# Altium PCB ECE453_Interface_LEDs.PcbDoc
Units mm, origin at the board's own origin, x right, y up, seen from the top; angles counter-clockwise.
Board outline 54.97 x 116.43 mm, 2 copper layers (Top Layer, Bottom Layer); 60 components, 52 nets, 187 pads, 189 vias.
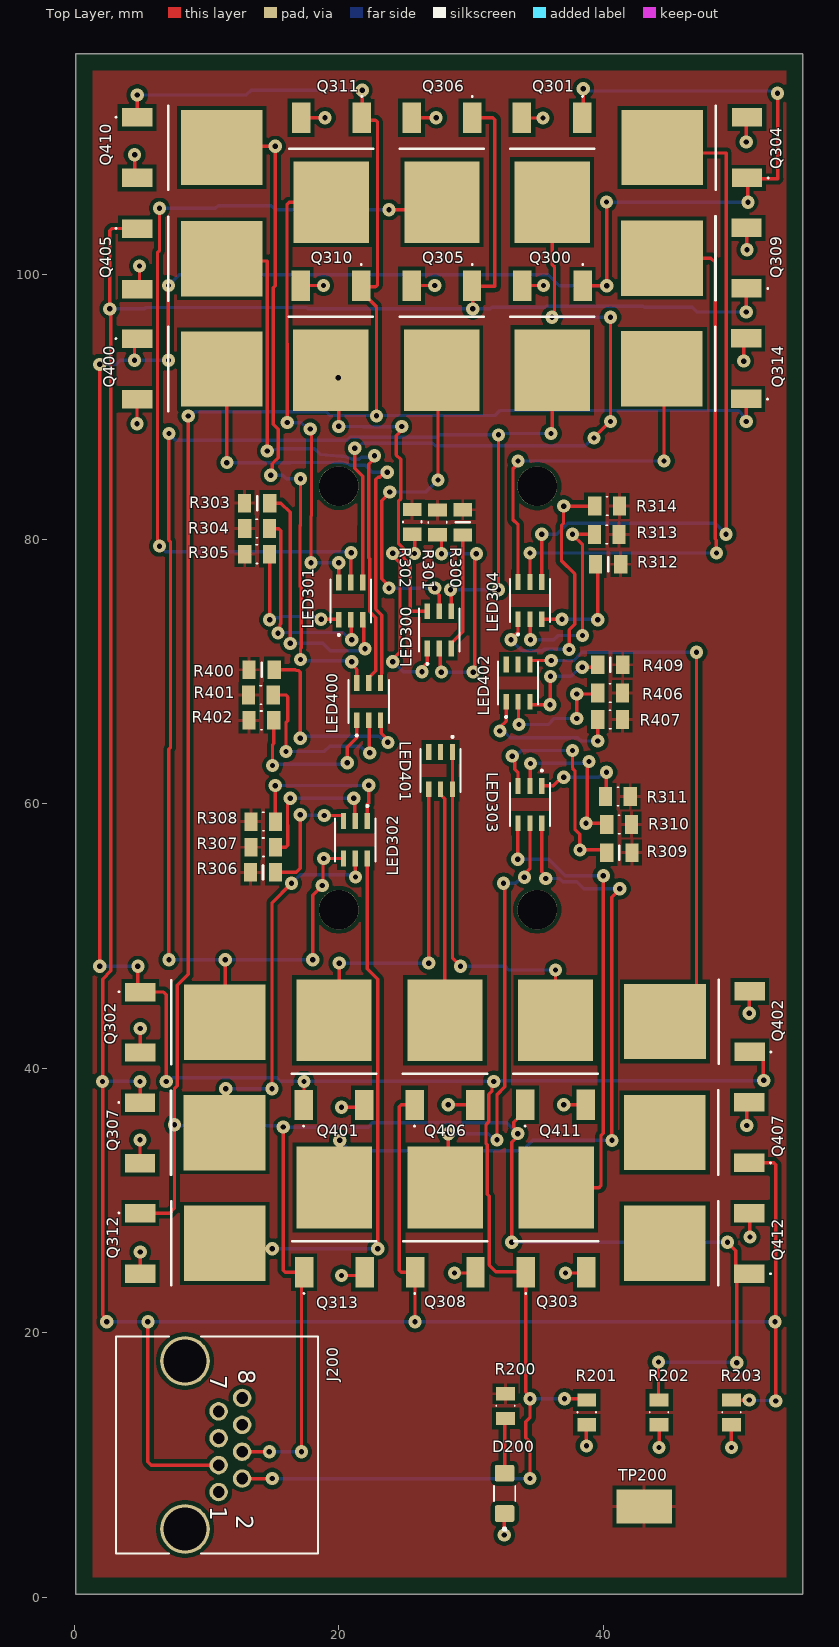
[diagram p0: Top Layer view]
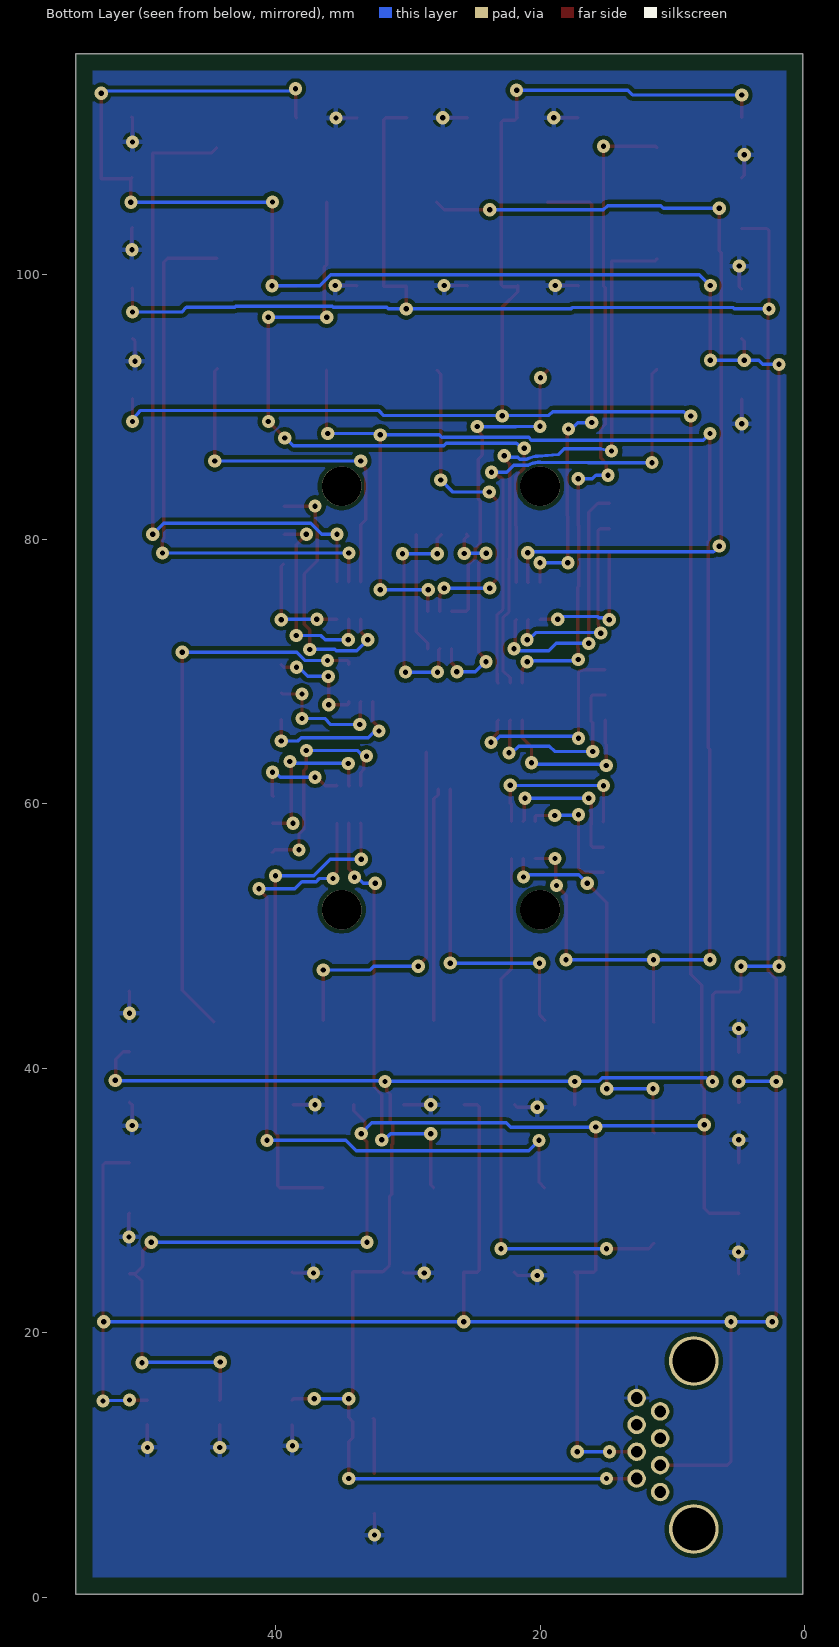
[diagram p1: Bottom Layer view, seen from below]

## Layer stack, top to bottom
Top Solder: solder mask 0.0102, Solder Resist, Dk 3.5
Top Layer: signal copper 0.0356
Dielectric1: dielectric 0.32, FR-4, Dk 4.8
Bottom Layer: signal copper 0.0356
Bottom Solder: solder mask 0.0102, Solder Resist, Dk 3.5

## Board outline
0.127,0.254 0.127,116.688 55.093,116.688 55.093,0.254

## Design rules (kind name [scope] priority, off if disabled: settings)
BoardOutlineClearance [All] p1: gap=1.27 ignorepadtopadclearanceinfootprint=FALSE
Clearance Polygon_Clearance [All vs InPolygon] p1: gap=0.305 ignorepadtopadclearanceinfootprint=FALSE except(0: Arc-Hole Track-Hole SMDPad-Hole THPad-Hole Via-Hole Fill-Hole Poly-Hole Region-Hole Text-Hole)
Clearance [All] p2: gap=0.2 ignorepadtopadclearanceinfootprint=TRUE except(0: Arc-Hole Track-Hole SMDPad-Hole THPad-Hole Via-Hole Fill-Hole Poly-Hole Region-Hole Text-Hole)
ComponentClearance [InComponent('U3')] p1: gap=0 collisioncheckmode=3 verticalgap=0.254 showdistances=FALSE
Height [All] p1: minheight=0 maxheight=22 prefheight=12.7
HoleSize [All] p1: absolutevalues=TRUE maxlimit=6.35 minlimit=0.03 maxpercent=80.000 minpercent=20.000
MinimumAnnularRing [All] p1: minimumring=0.178
MinimumSolderMaskSliver [All] p1: minsoldermaskwidth=0.178
NetAntennae NetAntennae_5.0V [InNet('5.0V')] p1: netantennaetolerance=0
NetAntennae NetAntennae_3.3V [InNet('3.3V')] p2: netantennaetolerance=0
PolygonConnect [IsNamedPolygon('5.0V_L01_P019') or IsNamedPolygon('3.3V_L01_P020') vs IsVia] p1: connectstyle=Relief reliefconductorwidth=0.254 reliefentries=4 polygonreliefangle="90 Angle" airgapwidth=0.254
PolygonConnect PolygonConnect_2 [All vs IsVia] p2: connectstyle=Relief reliefconductorwidth=0.381 reliefentries=4 polygonreliefangle="90 Angle" airgapwidth=0.254
PolygonConnect PolygonConnect_1 [All] p3: connectstyle=Relief reliefconductorwidth=0.254 reliefentries=4 polygonreliefangle="90 Angle" airgapwidth=0.254
RoutingVias [All] p1: holewidth=0.711 width=1.27 viastyle="Through Hole" minholewidth=0.381 minwidth=0.635 maxholewidth=0.711 maxwidth=1.27
SolderMaskExpansion [All] p1: expansion=0.102 istentingtop=FALSE
Width [All] p1: maxlimit=12 minlimit=0.1 preferedwidth=0.254 minimp=50.000000 maximp=50.000000 favimp=50.000000
25 further rules are at their usual default settings.

## Classes and differential pairs
component class 04_LEDs_5_9: LED400 LED401 LED402 Q400 Q401 Q402 Q405 Q406 Q407 Q410 Q411 Q412 R400 R401 R402 R403 R404 R405 R406 R407 R409
component class 03_LEDs_0_4: LED300 LED301 LED302 LED303 LED304 Q300 Q301 Q302 Q303 Q304 Q305 Q306 Q307 Q308 Q309 Q310 Q311 Q312 Q313 Q314 R300 R301 R302 R303 R304 R305 R306 R307 R308 R309 R310 R311 R312 R313 R314
component class 02_Input: D200 J200 R200 R201 R202 R203 TP200

## Components (designator, comment, footprint, x,y, rotation, side; value= is the part's Value field where it differs from the comment)
D200 "598-8220-107F" LEDSC160X320X90-2N 32.537,7.873 r90 top
J200 "RJHSE-5080" CONN_RJSBE5080_16P13X12P57_AMP 10.922,7.976 r270 top
LED300 "ASMT-YTB7-0AA02" LED_ASMT-YTB2-0BB02 27.595,73.139 r90 top
LED301 "ASMT-YTB7-0AA02" LED_ASMT-YTB2-0BB02 20.904,75.324 r90 top
LED302 "ASMT-YTB7-0AA02" LED_ASMT-YTB2-0BB02 21.26,57.277 r270 top
LED303 "ASMT-YTB7-0AA02" LED_ASMT-YTB2-0BB02 34.453,59.942 r270 top
LED304 "ASMT-YTB7-0AA02" LED_ASMT-YTB2-0BB02 34.453,75.364 r90 top
LED400 "ASMT-YTB7-0AA02" LED_ASMT-YTB2-0BB02 22.261,67.716 r90 top
LED401 "ASMT-YTB7-0AA02" LED_ASMT-YTB2-0BB02 27.697,62.5 r270 top
LED402 "ASMT-YTB7-0AA02" LED_ASMT-YTB2-0BB02 33.553,69.126 r90 top
Q300 "SIHFR120-GE3" SIHFR120GE3 36.144,95.815 r180 top
Q301 "SIHFR120-GE3" SIHFR120GE3 36.13,108.515 r180 top
Q302 "SIHFR120-GE3" SIHFR120GE3 8.336,43.485 r270 top
Q303 "SIHFR120-GE3" SIHFR120GE3 36.435,27.934 r0 top
Q304 "SIHFR120-GE3" SIHFR120GE3 47.509,109.601 r90 top
Q305 "SIHFR120-GE3" SIHFR120GE3 27.787,95.815 r180 top
Q306 "SIHFR120-GE3" SIHFR120GE3 27.799,108.515 r180 top
Q307 "SIHFR120-GE3" SIHFR120GE3 8.321,35.128 r270 top
Q308 "SIHFR120-GE3" SIHFR120GE3 28.053,27.934 r0 top
Q309 "SIHFR120-GE3" SIHFR120GE3 47.484,101.244 r90 top
Q310 "SIHFR120-GE3" SIHFR120GE3 19.405,95.815 r180 top
Q311 "SIHFR120-GE3" SIHFR120GE3 19.442,108.515 r180 top
Q312 "SIHFR120-GE3" SIHFR120GE3 8.336,26.772 r270 top
Q313 "SIHFR120-GE3" SIHFR120GE3 19.671,27.934 r0 top
Q314 "SIHFR120-GE3" SIHFR120GE3 47.464,92.888 r90 top
Q400 "SIHFR120-GE3" SIHFR120GE3 8.108,92.862 r270 top
Q401 "SIHFR120-GE3" SIHFR120GE3 19.645,40.583 r0 top
Q402 "SIHFR120-GE3" SIHFR120GE3 47.718,43.536 r90 top
Q405 "SIHFR120-GE3" SIHFR120GE3 8.108,101.194 r270 top
Q406 "SIHFR120-GE3" SIHFR120GE3 28.027,40.583 r0 top
Q407 "SIHFR120-GE3" SIHFR120GE3 47.693,35.154 r90 top
Q410 "SIHFR120-GE3" SIHFR120GE3 8.108,109.601 r270 top
Q411 "SIHFR120-GE3" SIHFR120GE3 36.384,40.589 r0 top
Q412 "SIHFR120-GE3" SIHFR120GE3 47.693,26.772 r90 top
R200 "1625868-6" RESC2012X65N 32.614,14.473 r90 top
R201 "1614886-1" RESC2012X65N 38.749,13.991 r90 top
R202 "1614886-1" RESC2012X65N 44.216,13.991 r90 top
R203 "1614886-1" RESC2012X65N 49.682,13.991 r90 top
R300 "CR0805-JW-510ELF" RESC2012X60N 29.373,81.273 r270 top
R301 "1-2176327-0" RESC2012X65N 27.468,81.268 r90 top
R302 "1-2176327-0" RESC2012X65N 25.552,81.305 r90 top
R303 "CR0805-JW-510ELF" RESC2012X60N 13.829,82.728 r0 top
R304 "1-2176327-0" RESC2012X65N 13.829,80.797 r180 top
R305 "1-2176327-0" RESC2012X65N 13.829,78.867 r180 top
R306 "CR0805-JW-510ELF" RESC2012X60N 14.28,54.813 r0 top
R307 "1-2176327-0" RESC2012X65N 14.295,56.718 r180 top
R308 "1-2176327-0" RESC2012X65N 14.295,58.649 r180 top
R309 "CR0805-JW-510ELF" RESC2012X60N 41.21,56.312 r180 top
R310 "1-2176327-0" RESC2012X65N 41.195,58.438 r0 top
R311 "1-2176327-0" RESC2012X65N 41.097,60.554 r0 top
R312 "CR0805-JW-510ELF" RESC2012X60N 40.361,78.105 r180 top
R313 "1-2176327-0" RESC2012X65N 40.26,80.349 r0 top
R314 "1-2176327-0" RESC2012X65N 40.284,82.499 r0 top
R400 "CR0805-JW-510ELF" RESC2012X60N 14.173,70.129 r0 top
R401 "1-2176327-0" RESC2012X65N 14.122,68.223 r180 top
R402 "1-2176327-0" RESC2012X65N 14.148,66.307 r180 top
R406 "1-2176327-0" RESC2012X65N 40.508,68.377 r0 top
R407 "1-2176327-0" RESC2012X65N 40.508,66.37 r0 top
R409 "CR0805-JW-510ELF" RESC2012X60N 40.523,70.51 r180 top
TP200 "TP_1206" TP-SMC-1206 43.078,6.883 r180 top

## Footprints (in the part's own frame and the unit in brackets; to place one, negate y for a bottom-side part, rotate by r counter-clockwise, add the part's x,y. Pads: shape width x height; smd on the part's side, far side on the other; paste and mask are expansions set on the pad)
CONN_RJSBE5080_16P13X12P57_AMP [mil]
  round 55 hole 35 mask+0: 1(0,0) 2(-40,70) 3(-80,0) 4(-120,70) 5(-160,0) 6(-200,70) 7(-240,0) 8(-280,70)
  round 148 hole 128: 9(-390,-100) 10(110,-100)
  silkscreen extent -463,-305 183,295, body extent 0,0 10,10, height 10
LED_ASMT-YTB2-0BB02 [mil]
  rect 47x16 smd paste+0 mask+0: 1(55.5,-35.43) 2(55.5,0) 3(55.5,35.43) 4(-55.5,35.43) 5(-55.5,0) 6(-55.5,-35.43)
  silkscreen extent -104,-60 64,60, body extent 0,0 10,10, height 10
LEDSC160X320X90-2N [mm] "Red Clear status LED"
  rrect25% 1.27x1.48 smd: A(1.525,0) C(-1.525,0)
  silkscreen extent -2.8,-0.8 0.57,0.8, body extent -1.6,-0.8 1.6,0.8, height 0.7
RESC2012X60N [mm]
  rect 1x1.4 smd: 1(-0.95,0) 2(0.95,0)
  silkscreen extent 0,-0.53 0,0.53, body extent -1,-0.63 1,0.63, height 0.6
RESC2012X65N [mm]
  rect 1x1.42 smd: 1(-0.935,0) 2(0.935,0)
  silkscreen extent -0.03,-0.7 0.05,0.7
SIHFR120GE3 [mil]
  rect 55x90 smd: 1(-90,-131.69) 2(90,-131.69)
  rect 224.02x243.31 smd: 3(0,120.24)
  silkscreen extent -125,-197 125,-39
TP-SMC-1206 [mm]
  rect 4.2x2.6 smd mask+0: 1(0,0)
  body extent -1.57,-0.79 1.63,0.81, height 1.22

## Part data
D200: "Red 625nm LED Indication - Discrete 2V 1206 _3216 Metric_", Package="1206 Dialight", MF=Dialight, MP=598-8220-107F, SnapEDA_Link=https://www.snapeda.com/parts/598-8220-107F/Dialight/view-part/454138/?ref=snap
J200: "Jack Modular Connector 8p8c (RJ45, Ethernet) 90Â° Angle (Right) Unshielded", Digikey Part No.=RJHSE-5080-ND, Manufacturer="Amphenol CS (Commercial Products)", Package=None, Digi-Key_Part_Number=RJHSE-5080-ND, Manufacturer Part No.=RJHSE-5080, MF="Amphenol Commercial Products", MP=RJHSE-5080, SnapEDA_Link=https://www.snapeda.com/parts/RJHSE-5080/Amphenol/view-part/4796273/?ref=snap
LED300 LED301 LED302 LED303 LED304 LED400 LED401 LED402: "No Description Available", Mfr_Name=Broadcom, Copyright="Copyright (C) 2022 Ultra Librarian. All rights reserved.", Digi-Key_Part_Number_1=ASMT-YTB7-0AA02-ND, Digi-Key_Part_Number_2=516-3132-2-ND, Digi-Key_Part_Number_3=516-3132-1-ND, Digi-Key_Part_Number_4=516-3132-6-ND, Manufacturer_Part_Number=ASMT-YTB7-0AA02, RefDes=RefDes, Type=DEV
Q300 Q301 Q302 Q303 Q304 Q305 Q306 Q307 Q308 Q309 Q310 Q311 Q312 Q313 Q314 Q400 Q401 Q402 Q405 Q406 Q407 Q410 Q411 Q412: "MOSFET (N-Channel)", Manufacturer_Name=Vishay, Datasheet Link=https://www.mouser.in/datasheet/2/427/91266-1768752.pdf, Height=2.38mm, Manufacturer_Part_Number=SIHFR120-GE3
R200: "Resistor 0805 200R 0.1% 25ppm (reel)", Package=None, Availability=Unavailable, MP=1625868-6, Price=None
R201 R202 R203: "CPF0805 10K 0.1% 25PPM 5K RL", Package=0805, Power_Rating=".1 W", Resistance=10K, Tolerance=.1%, Voltage_Rating="100 V", Availability=Warning, Check_prices=https://www.snapeda.com/parts/1614886-1/TE%20Connectivity/view-part/2202344/?ref=eda, EU_RoHS_Compliance=Compliant, MF="TE Connectivity", MP=1614886-1, Price=None, SnapEDA_Link=https://www.snapeda.com/parts/1614886-1/TE%20Connectivity/view-part/2202344/?ref=snap
R300 R303 R306 R309 R312 R400 R409: "Resistor", Manufacturer_Name=Bourns, Datasheet Link=https://www.bourns.com/pdfs/chpreztr.pdf, Height=0.6mm, Manufacturer_Part_Number=CR0805-JW-510ELF
R301 R302 R304 R305 R307 R308 R310 R311 R313 R314 R401 R402 R406 R407: "Fixed Resistor CRGP 0805 56R 1%", Package=None, Availability=Unavailable, MP=1-2176327-0, Price=None
TP200: "Test Point SMD 1206", Case Size=1206, Manufacturer="TE Connectivity (Tyco Electronics)", Manufacturer Part Number=1625854-1, Operating Temperature="-55 to 125 C", Power Rating=N/R, Resistance Value="0 Ohm", Supplier Part Number=A106143CT-ND, ComponentLink1Description=https://datasheet.ciiva.com/6439/eng-ds-1773266-a-6439169.pdf, ComponentLink1URL=https://datasheet.ciiva.com/6439/eng-ds-1773266-a-6439169.pdf, ComponentLink2Description=https://datasheet.ciiva.com/30136/1773266-a-30136341.pdf, ComponentLink2URL=https://datasheet.ciiva.com/30136/1773266-a-30136341.pdf, ComponentLink3Description=https://datasheet.ciiva.com/6439/eng-ds-1773266-a-6439080.pdf, ComponentLink3URL=https://datasheet.ciiva.com/6439/eng-ds-1773266-a-6439080.pdf, ComponentLink4Description=https://datasheet.ciiva.com/6439/eng-ds-1773266-a-6439081.pdf, ComponentLink4URL=https://datasheet.ciiva.com/6439/eng-ds-1773266-a-6439081.pdf, ComponentLink5Description=https://datasheet.ciiva.com/6439/eng-ds-1773266-a-6439083.pdf, ComponentLink5URL=https://datasheet.ciiva.com/6439/eng-ds-1773266-a-6439083.pdf, Dimension="3.2 x 1.6 x 1.25mm", Family=RC, Mounting="Surface Mount", Packaging="Tape and Reel", Part No=1625854-1, Pricing 1="1=0.28, 10=0.261, 25=0.224, 50=0.1902, 100=0.1828, 250=0.1641, 500=0.1567, 1000=0.1306 (USD)", RoHS=Yes, Stock 1=31937, Supplier=Digi-Key, Temperature Coefficient=N/R, Terminal Pitch=N/R, Termination Style=N/R, Tolerance=N/R

## Free pads (board coordinates)
  round 3 hole 3: mount(35,84) mount1(20,52) mount1(20,84) mount1(35,52)

## Via types
v1: diameter 1, hole 0.4, Top Layer to Bottom Layer, 189 vias

## Nets (pads, with @x,y where several pads share a name; then routed paths per layer and width w, separated by ;. In a path a pad name is that pad's centre, name@x,y a point inside that pad or via, vN(x,y) a via of type N, cw(c..) or ccw(c..) an arc to the next point about the centre after c; other vN are vias at no path point)
5.0V: R200.2 R300.1 R301.2 R302.2 R303.1 R304.2 R305.2 R306.1 R307.2 R308.2 R309.1 R310.2 R311.2 R312.1 R313.2 R314.2 R400.1 R401.2 R402.2 R406.2 R407.2 R409.1 TP200.1
GND: D200.C J200.8 Q300.2 Q301.2 Q302.2 Q303.2 Q304.2 Q305.2 Q306.2 Q307.2 Q308.2 Q309.2 Q310.2 Q311.2 Q312.2 Q313.2 Q314.2 Q400.2 Q401.2 Q402.2 Q405.2 Q406.2 Q407.2 Q410.2 Q411.2 Q412.2 R201.1 R202.1 R203.1 | length 49.3
  Top Layer w0.254: v1(4.572,109.055) 4.572,107.505 Q410.2 ; v1(4.75,88.728) 4.75,90.564 Q400.2 ; Q405.2 4.94,99.085 v1(4.94,100.647) ; Q307.2 v1(4.976,34.595) ; Q312.2 5.004,24.498 v1(5.004,26.111) v1@5.004,26.365 ; Q302.2 v1(4.991,43.008) ; Q310.2 17.134,99.174 v1(18.85,99.174) ; Q311.2 v1(18.96,111.86) ; v1(20.206,24.346) 21.713,24.346 Q313.2 ; v1(20.206,37.054) 21.747,37.054 Q401.2 ; Q305.2 25.516,99.174 v1(27.255,99.174) ; Q306.2 v1(27.362,111.86) ; v1(28.27,37.244) 30.307,37.244 Q406.2 ; v1(28.753,24.536) 30.286,24.536 Q308.2 ; v1(32.512,4.724) 32.512,6.323 D200.C ; Q301.2 33.867,111.836 v1(35.433,111.836) v1@35.484,111.836 ; Q300.2 33.873,99.174 v1(35.484,99.174) ; v1(37.008,37.244) Q411.2 ; v1(37.135,24.536) 38.668,24.536 Q303.2 ; v1(38.721,11.464) 38.721,13.028 R201.1 ; v1(44.216,11.348) R202.1 ; v1(49.682,11.348) R203.1 ; v1(50.619,93.459) 50.619,94.983 Q314.2 ; v1(50.809,110.027) 50.809,111.842 Q304.2 ; Q309.2 50.854,103.505 v1(50.854,101.875) ; v1(50.838,35.674) 50.838,37.24 Q407.2 ; Q412.2 51.079,29.016 v1(51.079,27.254) ; v1(51.038,44.166) 51.038,45.796 Q402.2
LED_1_BLUE_IN: LED300.6 R300.2 | length 9
  Top Layer w0.254: LED300.6 28.495,72.123 29.373,73.001 R300.2
LED_1_BLUE_OUT: LED300.1 LED302.1 Q300.3 Q302.3 | length 116.1
  Top Layer w0.254: v1(7.163,48.209) 7.163,64.129 7.279,64.244 7.279,79.819 7.163,79.935 v1(7.163,87.986) ; Q302.3 11.43,43.525 v1(11.43,48.209) ; v1(18.034,48.209) 18.034,53.093 18.601,53.66 18.756,53.66 v1(18.756,53.814) 18.814,53.872 18.814,55.809 v1(18.872,55.867) LED302.1 ; v1(28.448,76.175) 28.495,76.127 LED300.1 ; v1(32.08,76.175) v1(32.08,87.884) ; v1(36.043,87.986) 36.144,88.087 Q300.3
  Bottom Layer w0.254: v1(7.163,48.209) v1(11.43,48.209) v1(18.034,48.209) ; v1(7.163,87.986) 7.583,87.566 7.657,87.491 20.662,87.491 20.862,87.692 21.547,87.692 ccw(c21.569,87.945) 21.592,87.692 27.293,87.692 27.295,87.689 27.435,87.689 27.63,87.884 v1(32.08,87.884) ; v1(28.448,76.175) v1(32.08,76.175) ; v1@32.08,87.986 v1(36.043,87.986)
LED_1_GREEN_IN: LED300.5 R301.1 | length 17.5
  Top Layer w0.254: R301.1 27.767,80.034 v1(27.767,78.892) ; LED300.5 27.672,71.653 27.672,70.039 v1(27.759,69.952) ; v1(30.175,69.952) 30.29,70.066 30.29,78.778 v1(30.404,78.892)
  Bottom Layer w0.254: v1(27.759,69.952) v1(30.175,69.952) ; v1(27.767,78.892) v1(30.404,78.892)
LED_1_GREEN_OUT: LED300.2 Q305.3 | length 25.6
  Top Layer w0.254: v1(23.8,76.301) 23.8,76.452 23.252,77 23.252,82.918 23.851,83.517 v1(23.851,83.566) ; v1@27.356,76.301 v1(27.255,76.301) 27.255,76.1 27.595,75.759 LED300.2 ; v1(27.507,84.478) 27.507,92.48 Q305.3
  Bottom Layer w0.254: v1(23.8,76.301) v1(27.255,76.301) ; v1(23.851,83.566) 26.595,83.566 v1(27.507,84.478)
LED_1_RED_IN: LED300.4 R302.1 | length 16.4
  Top Layer w0.254: v1(24.079,78.943) 24.079,78.76 24.627,78.212 24.627,71.445 24.087,70.905 v1(24.087,70.739) ; R302.1 25.419,80.237 25.494,80.237 25.733,79.997 v1(25.733,78.918) ; v1(26.289,69.977) 26.289,70.252 26.695,70.658 LED300.4
  Bottom Layer w0.254: v1(24.079,78.943) 24.092,78.93 25.721,78.93 v1(25.733,78.918) ; v1(24.087,70.739) 24.126,70.739 24.888,69.977 v1(26.289,69.977)
LED_1_RED_OUT: LED300.3 Q310.3 | length 25.2
  Top Layer w0.254: Q310.3 20.004,92.162 v1(20.004,88.526) ; v1(24.755,88.519) 24.612,88.376 24.612,88.086 24.359,87.832 24.359,86.36 24.678,86.041 24.678,83.038 24.515,82.876 24.515,79.677 24.906,79.286 24.906,78.575 25.419,78.063 25.419,74.698 25.568,74.549 LED300.3
  Bottom Layer w0.254: v1(20.004,88.526) 20.012,88.519 21.816,88.519 21.842,88.494 24.73,88.494 v1(24.755,88.519)
  other v1: 19.964,92.202
LED_2_BLUE_IN: LED301.6 R303.2 | length 20
  Top Layer w0.254: R303.2 15.625,82.728 16.328,82.025 v1(16.328,72.123) ; LED301.6 21.88,73.838 21.88,71.823 v1(21.979,71.724)
  Bottom Layer w0.254: v1(16.328,72.123) 18.792,72.123 19.353,71.563 21.616,71.563 21.777,71.724 v1(21.979,71.724)
LED_2_BLUE_OUT: LED301.1 Q301.3 | length 51.9
  Top Layer w0.254: v1(21.205,86.865) 21.216,86.854 21.216,85.368 21.827,84.757 21.827,80.991 21.804,80.969 LED301.1 ; v1(36.119,96.774) 36.119,96.976 36.311,97.168 36.311,100.574 36.13,100.755 Q301.3 ; v1(39.294,87.655) v1(40.538,88.9) v1(40.538,96.774)
  Bottom Layer w0.254: v1(21.205,86.865) 21.407,86.865 21.78,87.238 27.105,87.238 27.286,87.057 38.646,87.057 39.244,87.655 v1(39.294,87.655) ; v1(36.119,96.774) v1(40.538,96.774)
LED_2_GREEN_IN: LED301.5 R304.1 | length 16.1
  Top Layer w0.254: R304.1 15.476,80.797 15.625,80.649 15.625,73.596 15.556,73.527 15.556,73.043 v1(15.413,72.9) ; LED301.5 20.942,73.876 20.942,72.428 v1(20.98,72.39)
  Bottom Layer w0.254: v1(15.413,72.9) 15.463,72.95 20.295,72.95 20.855,72.39 v1(20.98,72.39)
LED_2_GREEN_OUT: LED301.2 Q306.3 | length 64.4
  Top Layer w0.254: v1(6.452,79.477) 6.452,79.678 6.3,79.83 6.3,101.665 6.452,101.817 v1(6.452,105.012) ; LED301.2 20.921,76.75 20.921,78.953 v1(20.937,78.97) ; v1(23.8,104.906) 27.244,104.906 Q306.3
  Bottom Layer w0.254: v1(6.452,79.477) 6.886,79.042 20.865,79.042 v1(20.937,78.97) ; v1(6.452,105.012) 10.674,105.012 10.879,105.217 14.899,105.217 15.21,104.906 v1(23.8,104.906)
LED_2_RED_IN: LED301.4 R305.1 | length 10.4
  Top Layer w0.254: R305.1 14.776,78.854 v1(14.776,73.917) ; v1(18.669,73.954) 19.964,73.954 LED301.4
  Bottom Layer w0.254: v1(14.776,73.917) 14.916,74.057 15.57,74.057 15.67,74.157 18.265,74.157 18.467,73.954 v1(18.669,73.954)
LED_2_RED_OUT: LED301.3 Q311.3 | length 35.6
  Top Layer w0.254: v1(16.1,88.813) 16.1,94.795 16.094,94.801 16.094,105.312 16.243,105.461 Q311.3 ; v1(17.844,88.322) 17.937,88.229 17.937,81.753 17.899,81.715 v1(17.899,78.215) ; LED301.3 v1(20.004,78.215)
  Bottom Layer w0.254: v1(16.1,88.813) 17.152,88.813 17.642,88.322 v1(17.844,88.322) ; v1(17.899,78.215) v1(20.004,78.215)
LED_3_BLUE_IN: LED302.6 R306.2 | length 9.8
  Top Layer w0.254: R306.2 16.797,54.813 17.094,55.111 v1(17.094,59.17) v1@17.12,59.144 ; v1@18.872,59.144 v1(18.898,59.118) 20.284,59.118 20.36,59.042 LED302.6
  Bottom Layer w0.254: v1(17.094,59.17) 17.12,59.144 18.872,59.144 v1(18.898,59.118)
LED_3_GREEN_IN: LED302.5 R307.1 | length 11.2
  Top Layer w0.254: R307.1 16.006,56.718 16.154,56.867 16.154,58.399 16.132,58.421 16.132,59.954 16.328,60.149 v1(16.328,60.424) ; v1(21.143,60.424) 21.202,60.366 21.202,58.745 LED302.5
  Bottom Layer w0.254: v1(16.328,60.424) v1(21.143,60.424)
LED_3_GREEN_OUT: LED302.2 Q307.3 | length 29.6
  Top Layer w0.254: Q307.3 11.466,35.219 v1(11.466,38.466) ; v1(14.961,38.466) 14.961,52.516 v1(16.43,53.986) ; v1(21.26,54.458) LED302.2
  Bottom Layer w0.254: v1(11.466,38.466) v1(14.961,38.466) ; v1(16.43,53.986) 17.085,54.641 20.874,54.641 21.058,54.458 v1(21.26,54.458)
LED_3_RED_IN: LED302.4 R308.1 | length 12.5
  Top Layer w0.254: v1(15.205,61.373) 15.205,58.674 R308.1 ; LED302.4 22.16,59.951 22.261,60.052 v1(22.261,61.392)
  Bottom Layer w0.254: v1(15.205,61.373) 15.218,61.386 22.256,61.386 v1(22.261,61.392)
LED_3_RED_OUT: LED302.3 Q312.3 | length 41.6
  Top Layer w0.254: Q312.3 11.797,26.365 v1(14.972,26.365) ; LED302.3 22.16,47.52 22.957,46.723 v1(22.957,26.365)
  Bottom Layer w0.254: v1(14.972,26.365) v1(22.957,26.365)
LED_4_BLUE_IN: LED303.6 R309.2 | length 17
  Top Layer w0.254: v1(33.122,63.602) 33.316,63.407 33.316,62.596 33.553,62.358 LED303.6 ; v1(37.666,64.03) 37.666,62.703 37.857,62.512 37.857,58.061 38.227,57.692 v1(38.227,56.515) 40.057,56.515 R309.2
  Bottom Layer w0.254: v1(33.122,63.602) 33.397,63.602 33.825,64.03 v1(37.666,64.03)
LED_4_BLUE_OUT: LED303.1 Q303.3 | length 36.7
  Top Layer w0.254: v1(33.524,55.809) 33.539,55.824 33.539,58.517 LED303.1 ; Q303.3 39.673,30.988 39.822,31.137 39.822,34.898 40.005,35.081 v1(40.005,54.564)
  Bottom Layer w0.254: v1(33.524,55.809) 35.861,55.809 37.106,54.564 v1(40.005,54.564)
LED_4_GREEN_IN: LED303.5 R310.1 | length 12.5
  Top Layer w0.254: LED303.5 34.435,61.37 34.473,61.408 34.473,63.023 v1(34.493,63.043) ; v1(38.913,63.202) 38.798,63.087 38.798,58.636 v1(38.684,58.522) 38.798,58.522 R310.1@40.23,58.522
  Bottom Layer w0.254: v1(34.493,63.043) 34.519,63.068 38.779,63.068 v1(38.913,63.202)
LED_4_GREEN_OUT: LED303.2 Q308.3 | length 33.7
  Top Layer w0.254: Q308.3 28.27,31.206 v1(28.27,35.049) ; v1(31.963,34.595) 31.963,38.007 32.552,38.596 32.552,53.891 v1(32.457,53.986) ; v1(34.032,54.454) 34.032,54.656 34.453,55.077 LED303.2
  Bottom Layer w0.254: v1(28.27,35.049) 31.306,35.049 31.761,34.595 v1(31.963,34.595) ; v1(32.457,53.986) 33.362,53.986 33.83,54.454 v1(34.032,54.454)
LED_4_RED_IN: LED303.4 R311.1 | length 7.2
  Top Layer w0.254: LED303.4@35.394,61.392 LED303.4 36.221,61.352 36.871,62.001 v1(37.008,62.001) ; R311.1 40.234,60.625 v1(40.234,62.375)
  Bottom Layer w0.254: v1(37.008,62.001) 39.658,62.001 40.032,62.375 v1(40.234,62.375)
LED_4_RED_OUT: LED303.3 Q313.3 | length 54.5
  Top Layer w0.254: Q313.3 20.08,31.398 v1(20.08,34.555) ; LED303.3 35.353,54.856 35.656,54.554 v1(35.656,54.352) ; v1(40.649,34.555) 40.649,52.934 41.25,53.535 v1(41.25,53.579)
  Bottom Layer w0.254: v1(20.08,34.555) 20.868,33.768 33.885,33.768 34.673,34.555 v1(40.649,34.555) ; v1(35.656,54.352) 36.676,54.352 36.918,54.11 37.999,54.11 38.529,53.579 v1(41.25,53.579)
LED_5_BLUE_IN: LED304.6 R312.2 | length 8.5
  Top Layer w0.254: LED304.6 v1(36.871,73.954) ; R312.2 39.573,77.942 v1(39.573,73.914)
  Bottom Layer w0.254: v1(36.871,73.954) 36.891,73.934 39.553,73.934 v1(39.573,73.914)
LED_5_BLUE_OUT: LED304.1 Q304.3 | length 52
  Top Layer w0.254: LED304.1 v1(35.353,80.37) ; Q304.3 44.866,109.19 49.281,109.19 v1(49.281,80.37)
  Bottom Layer w0.254: v1(35.353,80.37) 36.497,80.37 37.324,81.197 48.454,81.197 v1(49.281,80.37)
LED_5_GREEN_IN: LED304.5 R313.1 | length 15.3
  Top Layer w0.254: LED304.5 34.473,73.935 34.473,72.41 v1(34.493,72.39) ; v1(38.43,72.72) 38.43,79.569 37.666,80.333 v1(37.666,80.37) 39.303,80.37 R313.1
  Bottom Layer w0.254: v1(34.493,72.39) 36.252,72.39 36.582,72.72 v1(38.43,72.72)
LED_5_GREEN_OUT: LED304.2 Q309.3 | length 42.4
  Top Layer w0.254: LED304.2 v1(34.453,78.952) ; Q309.3 48.133,101.244 48.454,100.924 48.454,80.028 48.548,79.934 v1(48.548,78.952)
  Bottom Layer w0.254: v1(34.453,78.952) v1(48.548,78.952)
LED_5_RED_IN: LED304.4 R314.1 | length 20.4
  Top Layer w0.254: v1(33.023,72.39) 33.023,72.478 33.553,73.008 LED304.4 ; v1(37.414,71.653) 37.414,73.137 37.833,73.556 37.833,77.371 36.839,78.364 36.839,81.016 36.989,81.166 36.989,82.48 v1(37.008,82.499) R314.1
  Bottom Layer w0.254: v1(33.023,72.39) 33.85,71.563 35.404,71.563 35.516,71.676 37.392,71.676 v1(37.414,71.653)
LED_5_RED_OUT: LED304.3 Q314.3 | length 27.5
  Top Layer w0.254: LED304.3 33.553,81.097 33.173,81.478 33.173,85.332 33.553,85.712 v1(33.553,85.914) ; Q314.3 44.588,92.71 v1(44.588,85.914)
  Bottom Layer w0.254: v1(33.553,85.914) v1(44.588,85.914)
LED_6_BLUE_IN: LED400.5 R401.1 | length 14.5
  Top Layer w0.254: R401.1 16.006,68.223 16.154,68.074 16.154,66.259 16.013,66.117 v1(16.013,63.952) ; LED400.5 22.302,66.266 22.302,63.888 v1(22.343,63.848)
  Bottom Layer w0.254: v1(16.013,63.952) 18.899,63.952 19.307,64.36 21.628,64.36 22.141,63.848 v1(22.343,63.848)
LED_6_BLUE_OUT: LED400.1 Q400.3 | length 36.3
  Top Layer w0.254: Q400.3 11.545,92.479 v1(11.545,85.788) ; LED400.1 23.238,69.202 23.238,69.854 23.26,69.876 23.26,74.257 22.798,74.718 22.798,84.514 22.978,84.693 23.1,84.693 23.471,85.065 v1(23.673,85.065)
  Bottom Layer w0.254: v1(11.545,85.788) 16.355,85.788 19.98,85.827 cw(c20,84) 20.91,85.584 21.999,85.584 22.519,85.065 v1(23.673,85.065)
LED_6_GREEN_IN: LED400.6 R400.2 | length 15.8
  Top Layer w0.254: R400.2 16.715,70.129 16.768,70.077 16.945,70.077 17.094,69.928 v1(17.094,64.948) ; LED400.6 23.227,66.241 23.227,65.329 23.715,64.841 v1(23.715,64.639)
  Bottom Layer w0.254: v1(17.094,64.948) 17.256,65.109 23.043,65.109 23.513,64.639 v1(23.715,64.639)
LED_6_GREEN_OUT: LED400.2 Q405.3 | length 44.1
  Top Layer w0.254: Q405.3 11.331,101.024 14.594,101.024 v1(14.594,86.664) ; LED400.2 22.261,69.52 22.806,70.064 22.806,74.069 22.344,74.53 22.344,78.535 22.281,78.598 22.281,85.681 22.708,86.107 v1(22.708,86.309)
  Bottom Layer w0.254: v1(14.594,86.664) 15.392,86.823 18.168,86.823 18.585,86.406 20.168,86.281 20.328,86.257 cw(c20,84) 21.024,86.038 21.547,86.038 21.7,86.19 22.589,86.19 v1(22.708,86.309)
LED_6_RED_IN: LED400.4 R402.1 | length 12.7
  Top Layer w0.254: v1(14.996,62.89) 14.996,64.471 15.083,64.558 R402.1 ; v1(20.649,63.094) 20.649,64.272 21.361,64.984 LED400.4
  Bottom Layer w0.254: v1(14.996,62.89) 15.098,62.992 20.548,62.992 v1(20.649,63.094)
LED_6_RED_OUT: LED400.3 Q410.3 | length 51.4
  Top Layer w0.254: Q410.3 11.268,109.707 14.998,109.707 v1@15.104,109.601 ; v1(14.859,84.836) 14.987,84.964 14.987,85.717 15.421,86.151 15.421,88.322 15.062,88.681 15.062,99.019 15.21,99.167 15.21,109.495 v1@15.104,109.601 ; v1(15.21,109.707) v1@15.104,109.601 ; v1(17.11,70.904) 17.11,71.736 17.155,71.781 17.155,76.363 17.072,76.446 17.072,81.028 17.11,81.066 v1(17.11,84.566) ; v1(20.979,70.736) 20.979,70.534 21.361,70.152 LED400.3
  Bottom Layer w0.254: v1(14.859,84.836) 15.778,84.836 16.048,84.566 v1(17.11,84.566) ; v1(17.11,70.904) 17.194,70.82 20.895,70.82 v1(20.979,70.736) v1@21.14,70.736
LED_7_BLUE_IN: LED401.5
LED_7_BLUE_OUT: LED401.1 Q401.3 | length 24.4
  Top Layer w0.254: Q401.3 20.041,44.033 v1(20.041,47.955) ; v1(26.797,47.955) LED401.1
  Bottom Layer w0.254: v1(20.041,47.955) v1(26.797,47.955)
LED_7_GREEN_IN: LED401.6
LED_7_GREEN_OUT: LED401.2 Q406.3 | length 17.6
  Top Layer w0.254: LED401.2 27.697,60.697 28.027,60.366 Q406.3
LED_7_RED_IN: LED401.3 LED401.4 Q411.3 | length 27.5
  Top Layer w0.254: LED401.4 LED401.3 28.597,48.353 29.203,47.746 v1(29.203,47.713) ; Q411.3 v1(36.384,47.433)
  Bottom Layer w0.254: v1(29.203,47.713) 32.582,47.713 32.862,47.433 v1(36.384,47.433)
LED_8_BLUE_IN: LED402.6 R409.2 | length 7.8
  Top Layer w0.254: LED402.6 34.453,67.564 34.53,67.488 v1(35.966,67.488) 35.985,67.507 35.985,69.609 v1(36.005,69.628) ; v1(38.411,70.311) 39.374,70.311 R409.2
  Bottom Layer w0.254: v1(36.005,69.628) 37.562,69.628 38.244,70.311 v1(38.411,70.311)
LED_8_BLUE_OUT: LED402.1 Q402.3 | length 42
  Top Layer w0.254: LED402.1 34.453,70.75 34.53,70.826 v1(36.072,70.826) ; Q402.3 47.041,45.912 v1(47.041,71.45)
  Bottom Layer w0.254: v1@36.072,70.88 v1(36.072,70.826) 37.757,70.826 38.381,71.45 v1(47.041,71.45)
LED_8_GREEN_IN: LED402.5 R406.1 | length 9.8
  Top Layer w0.254: LED402.5 33.591,67.678 33.591,66.027 v1(33.63,65.989) ; v1(37.998,66.446) v1(37.998,68.301) 39.497,68.301 R406.1
  Bottom Layer w0.254: v1(33.63,65.989) 35.829,65.989 36.286,66.446 v1(37.998,66.446)
LED_8_GREEN_OUT: Q407.3
LED_8_RED_IN: LED402.4 R407.1 | length 11.7
  Top Layer w0.254: v1(32.182,65.507) 32.182,65.782 32.653,66.253 LED402.4 ; v1(39.573,64.745) R407.1
  Bottom Layer w0.254: v1(32.182,65.507) 32.457,65.507 32.971,64.992 38.065,64.992 38.312,64.745 v1(39.573,64.745)
LED_8_RED_OUT: Q412.3
P9_0_LED_RED: J200.2 Q300.1 Q301.1 Q302.1 Q303.1 Q304.1 Q400.1 Q401.1 Q402.1 R201.2 | length 261.4
  Top Layer w0.254: v1@1.897,93.167 v1(1.942,93.212) v1(1.942,47.713) ; v1(4.559,93.523) 4.559,94.945 Q400.1 ; v1(4.817,47.713) 4.817,45.945 Q302.1 6.756,45.771 6.96,45.567 v1(6.96,39.014) ; v1(7.127,93.523) v1(7.127,99.174) ; J200.2 v1(14.972,8.992) ; Q401.1 17.374,37.253 v1(17.374,39.014) ; v1(31.725,39.014) 31.582,38.872 31.582,38.268 31.339,38.025 31.339,35.96 31.136,35.757 31.136,34.302 31.225,34.213 31.225,30.477 31.377,30.325 31.377,25.134 31.873,24.638 34.1,24.638 Q303.1 34.149,15.534 34.459,15.223 34.459,13.61 34.149,13.3 34.149,12.09 34.459,11.78 v1(34.459,8.992) ; v1(37.069,15.021) 38.653,15.021 R201.2 ; Q301.1 38.481,111.925 v1(38.481,114.046) ; Q300.1 Q300.1 v1(40.259,99.162) 40.246,99.174 40.246,105.474 v1(40.234,105.486) ; Q304.1 Q304.1@50.93,107.239 ; v1(50.93,105.461) Q304.1@50.93,107.239 ; Q402.1 51.508,41.25 52.079,40.678 52.079,39.132 v1(52.121,39.091) ; v1(53.162,113.716) 53.175,113.703 53.175,107.252 53.188,107.239 Q304.1@50.93,107.239
  Bottom Layer w0.254: v1(1.942,47.713) v1(4.817,47.713) ; v1(1.942,93.212) 3.167,93.212 3.478,93.523 v1(4.559,93.523) v1(7.127,93.523) ; v1(6.96,39.014) 7.161,39.014 7.44,39.293 15.303,39.293 15.582,39.014 v1(17.374,39.014) v1(31.725,39.014) ; v1(7.127,99.174) 7.954,100.001 35.826,100.001 36.666,99.162 v1(40.259,99.162) ; v1(14.972,8.992) v1(34.459,8.992) ; v1@31.763,39.014 31.801,39.052 52.083,39.052 v1(52.121,39.091) ; v1(34.459,15.021) v1(37.069,15.021) ; v1(38.481,114.046) 38.646,113.881 52.997,113.881 v1(53.162,113.716) ; v1(40.234,105.486) 40.246,105.474 50.918,105.474 v1(50.93,105.461)
P9_1_LED_GREEN: J200.3 Q305.1 Q306.1 Q307.1 Q308.1 Q309.1 Q405.1 Q406.1 Q407.1 R203.2 | length 266
  Top Layer w0.254: v1(2.461,20.839) 2.461,21.041 2.15,21.352 v1(2.15,39.014) 2.15,46.752 2.769,47.371 2.769,97.332 v1(2.692,97.409) 2.692,103.327 2.845,103.48 Q405.1 ; Q307.1@4.924,37.466 Q307.1 4.985,37.423 v1(4.985,39.014) ; v1(5.574,20.839) 5.574,10.269 5.835,10.008 J200.3 ; Q406.1 24.736,37.238 24.587,37.089 24.587,24.738 24.736,24.589 Q308.1 v1(25.767,20.839) ; Q306.1 31.656,111.86 31.804,111.711 31.804,99.109 30.124,99.109 v1(30.124,97.409) ; R203.2 v1(51.038,14.926) ; v1(50.809,97.168) 50.809,98.939 Q309.1 ; Q407.1 52.886,32.868 53.035,32.719 v1(53.035,14.859)
  Bottom Layer w0.254: v1(2.15,39.014) v1(4.985,39.014) ; v1(2.461,20.839) v1(5.574,20.839) v1(25.767,20.839) v1(52.973,20.839) ; v1(2.692,97.409) 5.318,97.409 5.424,97.515 17.549,97.515 17.654,97.409 v1(30.124,97.409) 31.469,97.409 31.585,97.525 35.623,97.525 35.7,97.601 43.002,97.601 43.078,97.525 46.73,97.525 47.087,97.168 v1(50.809,97.168) ; v1(51.038,14.926) 51.071,14.892 53.002,14.892 v1(53.035,14.859)
P9_2_LED_BLUE: J200.4 Q310.1 Q311.1 Q312.1 Q313.1 Q314.1 Q410.1 Q411.1 Q412.1 R202.2 | length 257.7
  Top Layer w0.254: Q410.1 v1(4.763,113.576) ; Q312.1 7.219,29.058 7.585,29.423 v1(7.585,35.738) 7.585,38.47 7.787,38.672 7.787,46.279 8.617,47.109 v1(8.617,89.317) ; J200.4 v1(14.757,11.024) ; v1(15.799,35.56) 15.799,24.738 15.948,24.589 Q313.1 17.191,24.395 v1(17.191,11.024) ; v1(21.774,113.94) 21.774,111.906 Q311.1 21.927,111.661 22.783,111.661 22.932,111.512 22.932,99.226 22.783,99.077 21.774,99.077 Q310.1 21.691,98.715 22.857,97.55 v1(22.857,89.321) ; v1(33.08,26.861) 33.08,34.421 33.524,34.864 33.524,35.268 33.232,35.56 33.232,35.934 34.098,36.8 Q411.1 ; v1(44.171,17.805) 44.171,14.971 R202.2 ; v1(49.39,26.861) 50.022,26.229 50.022,25.057 50.593,24.486 Q412.1@50.66,24.486 ; v1(50.089,17.755) 50.089,23.914 Q412.1@50.66,24.486 ; v1(50.809,88.9) Q314.1 ; Q412.1 Q412.1@50.66,24.486
  Bottom Layer w0.254: v1(4.763,113.576) 13.015,113.576 13.379,113.94 v1(21.774,113.94) ; v1(7.585,35.738) 7.674,35.649 15.71,35.649 v1(15.799,35.56) 22.224,35.56 22.54,35.876 32.713,35.876 v1(33.524,35.066) ; v1(8.617,89.317) 8.818,89.317 9.141,89.64 19.047,89.64 19.333,89.353 20.919,89.353 20.926,89.346 22.831,89.346 v1(22.857,89.321) 22.882,89.346 31.805,89.346 32.185,89.727 50.205,89.727 50.385,89.547 50.385,89.526 50.809,89.101 v1(50.809,88.9) ; v1(14.757,11.024) v1(17.191,11.024) ; v1(33.08,26.861) v1(49.39,26.861) ; v1(44.171,17.805) 44.196,17.78 50.063,17.78 v1(50.089,17.755)
STATUS_LED_IN: D200.A R200.1 | length 4.2
  Top Layer w0.254: D200.A 32.537,13.462 R200.1
pads on no net: J200.1 J200.5 J200.6 J200.7 J200.9 J200.10 LED402.2 LED402.3

## Polygon pours and split planes (outlines as drawn)
5.0V on Top Layer "5.0V_L01_P000" (solid, pour order 0): 0.14,116.667 0.165,116.642 55.054,116.642 55.054,0.284 55.105,0.234 0.114,0.234
GND on Bottom Layer "GND_L02_P001" (solid, pour order 1): 0.127,116.688 55.093,116.688 55.093,0.254 0.127,0.254

## Text inside footprints (layer, text, board x,y; h text height)
J200: Top Overlay "1" at 10.287,6.896 h1.27 r270; Top Overlay "2" at 12.268,6.223 h1.27 r270; Top Overlay "7" at 10.287,16.802 h1.27 r270; Top Overlay "8" at 12.421,17.221 h1.27 r270; Mechanical 13 "1" at 10.287,6.896 h1.27 r270; Mechanical 13 "2" at 12.065,6.896 h1.27 r270; Mechanical 13 "7" at 10.287,16.802 h1.27 r270; Mechanical 13 "8" at 12.065,16.802 h1.27 r270